# EAGLE board main_board (EAGLE 7.6.0)
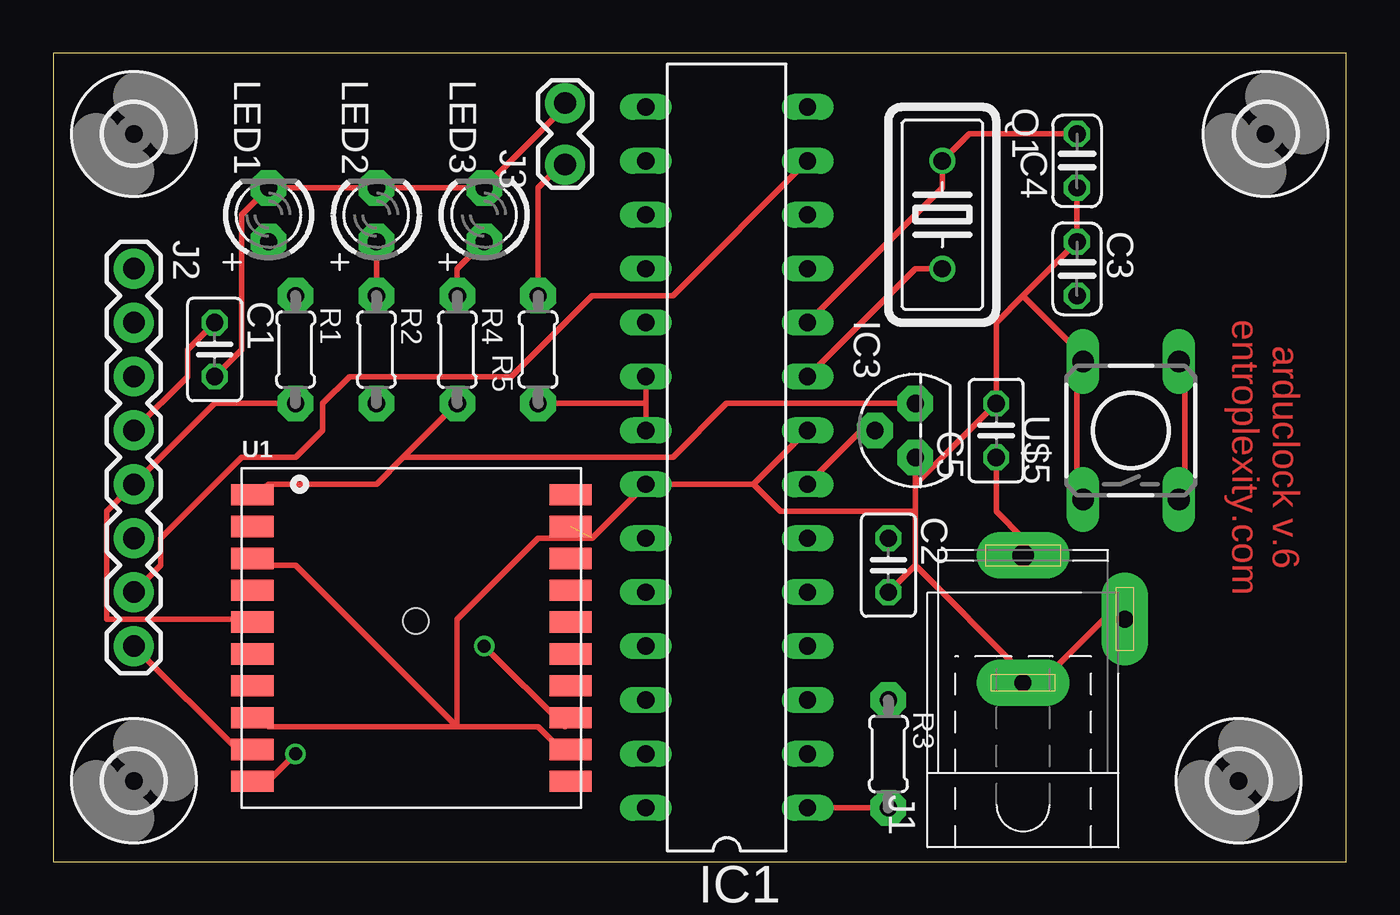
[diagram p0: board, top side]
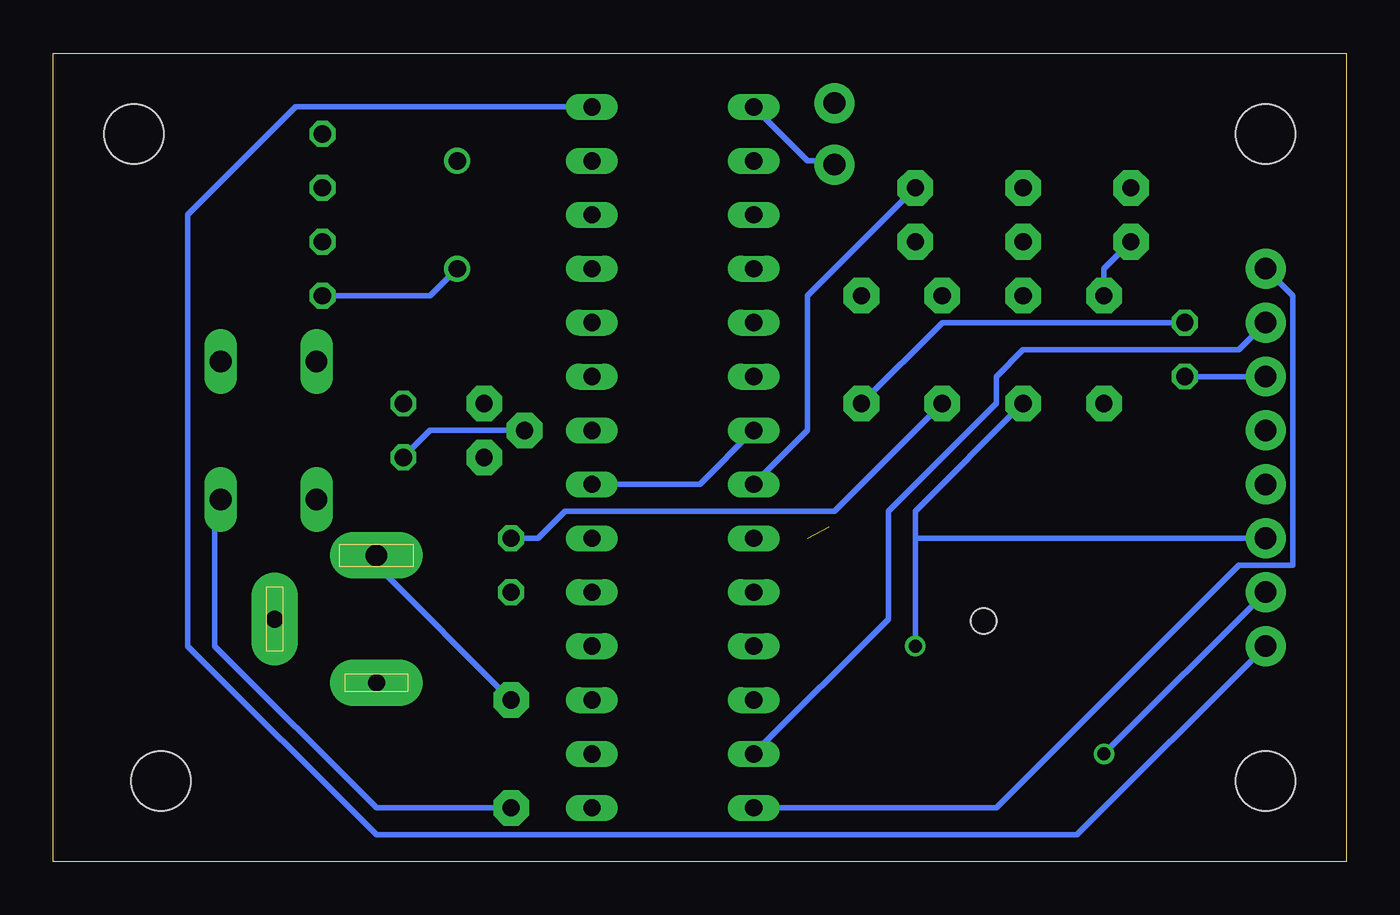
[diagram p1: board, bottom side, seen from below]

Size 60.96 x 38.1 mm. Coordinates in mm from the lower left corner, seen from the top.
Outline: 0,0 60.96,0 60.96,38.08 0,38.1 0,0
Copper layers (1*16): Top 0.0356mm / dielectric 1.5011mm / Bottom 0.0356mm
Design rules "oshpark-2layer": minimum track width 6mil, minimum drill 13mil, track to track 6mil, track to pad 6mil, pad to pad 6mil, via to via 6mil, smd to smd 6mil, copper to edge 15mil, drill to drill 6mil, minimum pad ring 7mil, minimum via ring 7mil, stop-mask expansion 2.5mil, vias tented up to drill 0mil, thermal gap 10mil

## Footprints (pad centres in the part's own frame; a part is rotated, then mirrored left to right if it is on the bottom)
C025-025X050 = drill 0.813 octagon: 1 -1.27,0; 2 1.27,0
C025-024X044 = drill 0.813 octagon: 1 -1.27,0; 2 1.27,0
DIL28-3 = drill 0.813 long: 1 -16.51,-3.81; 2 -13.97,-3.81; 3 -11.43,-3.81; 4 -8.89,-3.81; 5 -6.35,-3.81; 6 -3.81,-3.81; 7 -1.27,-3.81; 8 1.27,-3.81; 9 3.81,-3.81; 10 6.35,-3.81; 11 8.89,-3.81; 12 11.43,-3.81; 13 13.97,-3.81; 14 16.51,-3.81; 15 16.51,3.81; 16 13.97,3.81; 17 11.43,3.81; 18 8.89,3.81; 19 6.35,3.81; 20 3.81,3.81; 21 1.27,3.81; 22 -1.27,3.81; 23 -3.81,3.81; 24 -6.35,3.81; 25 -8.89,3.81; 26 -11.43,3.81; 27 -13.97,3.81; 28 -16.51,3.81
TO92 = drill 0.813 pad 1.676 octagon: 1 -1.27,0; 2 0,1.905; 3 1.27,0
SPC4078 = drill 0.8 pad 2.184 long: 1 -3,0; 2 0,-4.8 | drill 1 pad 2.184 long: 3 3,0
1X08_ROUND = drill 1.016 pad 1.88: 1 0,0; 2 2.54,0; 3 5.08,0; 4 7.62,0; 5 10.16,0; 6 12.7,0; 7 15.24,0; 8 17.78,0
1X02_LOCK = drill 1.016 pad 1.88: 1 -0.178,0; 2 2.718,0
LED3MM = drill 0.813 pad 1.676 octagon: A -1.27,0; K 1.27,0
HC18U-V = drill 0.813: 1 -2.54,0; 2 2.54,0
0204/5 = drill 0.813 pad 1.676 octagon: 1 -2.54,0; 2 2.54,0
FGPMMOPA6H = smd 2 x 1: 1 0.5,14.75; 2 0.5,13.25; 3 0.5,11.75; 4 0.5,10.25; 5 0.5,8.75; 6 0.5,7.25; 7 0.5,5.75; 8 0.5,4.25; 9 0.5,2.75; 10 0.5,1.25; 11 15.5,1.25; 12 15.5,2.75; 13 15.5,4.25; 14 15.5,5.75; 15 15.5,7.25; 16 15.5,8.75; 17 15.5,10.25; 18 15.5,11.75; 19 15.5,13.25; 20 15.5,14.75 | hole 1.2: 8.2,8.8
2,8 = hole 2.8: 0,0
TAC-SWITCH-PTH = drill 1.016 pad 1.524 long: 1 -3.251,2.261; 2 3.251,2.261; 3 -3.251,-2.261; 4 3.251,-2.261

## Placement (x,y rotation side)
C1  .1 uf  [C025-025X050]  7.62,24.13 270 top
C2  .1 uf  [C025-025X050]  39.37,13.97 270 top
C3  20pf  [C025-024X044]  48.26,27.94 270 top
C4  20pf  [C025-024X044]  48.26,33.02 90 top
C5  .1 uf  [C025-025X050]  44.45,20.32 90 top
IC1  ATMEGA168-PU  [DIL28-3]  31.75,19.05 90 top
IC3  3.3V  [TO92]  40.64,20.32 90 top
J1  5V Supply  [SPC4078]  45.72,11.43 90 top
J2  IO Header  [1X08_ROUND]  3.81,27.94 270 top
J3  DST  [1X02_LOCK]  24.13,33.02 90 top
LED1  Green  [LED3MM]  10.16,30.48 90 top
LED2  Blue  [LED3MM]  15.24,30.48 90 top
LED3  Red  [LED3MM]  20.32,30.48 90 top
Q1  16MHz  [HC18U-V]  41.91,30.48 270 top
R1  330  [0204/5]  11.43,24.13 270 top
R2  330  [0204/5]  15.24,24.13 270 top
R3  10 k  [0204/5]  39.37,5.08 270 top
R4  330  [0204/5]  19.05,24.13 270 top
R5  10 k  [0204/5]  22.86,24.13 90 top
U1  FGPMMOPA6H  [FGPMMOPA6H]  8.89,2.54 0 top
U$1  [2,8]  57.15,34.29 0 top
U$2  [2,8]  55.88,3.81 0 top
U$3  [2,8]  3.81,34.29 0 top
U$4  [2,8]  3.81,3.81 0 top
U$5  [TAC-SWITCH-PTH]  50.8,20.32 90 top

## Library data of the parts
C1 C2 C5 = rcl
C3 C4 = resistor
IC1 = Arduino-AVR
IC3 LED1-LED3 R1-R5 = adafruit
J1 = con-jack; OC_FARNELL: unknown; OC_NEWARK: unknown
J2 = SparkFun-Connectors; PROD_ID: CONN-08437
J3 = SparkFun-Connectors
Q1 = adafruit; OC_FARNELL: unknown; OC_NEWARK: unknown
U1 = Simplex-ICs
U$1-U$4 = holes
U$5 = GeekAmmo

## Nets
+5V: C1.1 C5.1 IC1.7 IC1.20 IC1.21 IC3.2 J1.3 J2.4 R3.1 R5.1
DST: IC1.15 J3.1 R5.2
GND: C1.2 C2.2 C3.1 C4.1 C5.2 IC1.8 IC1.22 IC3.1 J1.1 J1.2 J2.3 J3.2 LED1.K LED2.K LED3.K U1.3 U1.8 U1.12 U1.19 U$5.1 U$5.2
N$1: C4.2 IC1.10 Q1.1
N$2: C3.2 IC1.9 Q1.2
N$3: IC1.13 J2.7 U1.10
N$4: IC1.14 J2.8 U1.9
N$5: LED3.A R4.1
N$6: IC1.28 J2.1
N$7: IC1.1 R3.2 U$5.3 U$5.4
N$8: IC1.27 J2.2
N$9: J2.6 R2.2 U1.13
N$10: J2.5 R1.2 U1.5
N$15: LED1.A R1.1
N$16: LED2.A R2.1
VCC: C2.1 IC3.3 R4.2 U1.1

## Tracks (layer width: path | path; a pad name or v marks a point on that pad's centre or on a via)
+5V
  Top 0.254: IC1.7 38.1,20.32 IC3.2 | C5.1 44.45,16.51 45.72,15.24 J1.3 | IC1.20 27.94,21.59 | 27.94,21.59 IC1.21 | R5.1 27.94,21.59 | J2.4 6.35,22.86 6.35,24.13 C1.1
  Bottom 0.254: R3.1 45.72,13.97 J1.3 | IC3.2 43.18,20.32 C5.1 | C1.1 19.05,25.4 R5.1 | IC1.7 30.48,17.78 IC1.21
DST
  Top 0.254: R5.2 22.86,31.75 24.13,33.02 J3.1
  Bottom 0.254: IC1.15 25.4,33.02 24.13,33.02 J3.1
GND  (1 unrouted)
  Top 0.254: J3.2 24.13,35.56 LED3.K LED2.K LED1.K 8.89,30.48 8.89,24.13 C1.2 | 33.02,17.78 IC1.22 25.4,15.24 22.86,15.24 19.05,11.43 19.05,6.35 | IC1.8 33.02,17.78 | U$5.1 48.26,17.78 48.26,22.86 U$5.2 48.26,24.13 45.72,26.67 | C4.1 C3.1 45.72,26.67 | 40.64,13.97 C2.2 | IC3.1 40.64,17.78 | 40.64,17.78 40.64,16.51 | 40.64,16.51 40.64,13.97 | 40.64,17.78 C5.2 44.45,25.4 45.72,26.67 | 40.64,13.97 45.72,8.89 J1.1 45.72,7.62 49.53,11.43 J1.2 | 33.02,17.78 34.29,16.51 40.64,16.51 | 19.05,6.35 22.86,6.35 24.13,5.08 U1.12 | 19.05,6.35 10.16,6.35 U1.8 | 19.05,6.35 11.43,13.97 10.16,13.97 U1.3
  Bottom 0.254: J2.3 C1.2 | LED3.K 25.4,26.67 25.4,20.32 IC1.22
N$1
  Top 0.254: IC1.10 41.91,31.75 Q1.1 43.18,34.29 C4.2
N$2
  Top 0.254: IC1.9 40.64,27.94 Q1.2
  Bottom 0.254: C3.2 43.18,26.67 Q1.2
N$3  (via drill 0.61)
  Top 0.254: v11.43,5.08 10.16,3.81 U1.10 | IC1.13 29.21,26.67 25.4,26.67 21.59,22.86 13.97,22.86 12.7,21.59 12.7,20.32 11.43,19.05 8.89,19.05 5.08,15.24 5.08,13.97 J2.7
  Bottom 0.254: J2.7 v11.43,5.08
N$4
  Top 0.254: J2.8 8.89,5.08 U1.9
  Bottom 0.254: IC1.14 49.53,35.56 54.61,30.48 54.61,10.16 45.72,1.27 12.7,1.27 J2.8
N$5
  Top 0.254: R4.1 19.05,27.94 LED3.A
N$6
  Bottom 0.254: IC1.28 16.51,2.54 5.08,13.97 2.54,13.97 2.54,26.67 J2.1
N$7
  Top 0.254: R3.2 IC1.1 | U$5.3 53.34,17.78 53.34,22.86 U$5.4
  Bottom 0.254: R3.2 45.72,2.54 53.34,10.16 53.34,16.51 U$5.3
N$8
  Bottom 0.254: IC1.27 21.59,11.43 21.59,16.51 16.51,21.59 16.51,22.86 15.24,24.13 5.08,24.13 J2.2
N$9  (via drill 0.61)
  Top 0.254: v20.32,10.16 24.13,6.35 U1.13
  Bottom 0.254: 20.32,15.24 20.32,16.51 R2.2 | 20.32,15.24 v20.32,10.16 | 20.32,15.24 J2.6
N$10
  Top 0.254: U1.5 8.89,11.43 2.54,11.43 2.54,16.51 J2.5 7.62,21.59 R1.2
N$15
  Bottom 0.254: R1.1 11.43,27.94 LED1.A
N$16
  Top 0.254: LED2.A R2.1
VCC
  Top 0.254: R4.2 16.51,19.05 | 16.51,19.05 15.24,17.78 10.16,17.78 U1.1 | IC3.3 31.75,21.59 29.21,19.05 16.51,19.05
  Bottom 0.254: C2.1 38.1,15.24 36.83,16.51 24.13,16.51 R4.2

## Text on the board
Top: arduclock v.6 / entroplexity.com